# Altium PCB Resonator_Layout.PcbDoc
Units mil, origin at the board's own origin, x right, y up, seen from the top; angles counter-clockwise.
Board outline 830 x 1250 mil, 2 copper layers (Top Layer, Bottom Layer); 20 components, 19 nets, 84 pads, 21 vias.
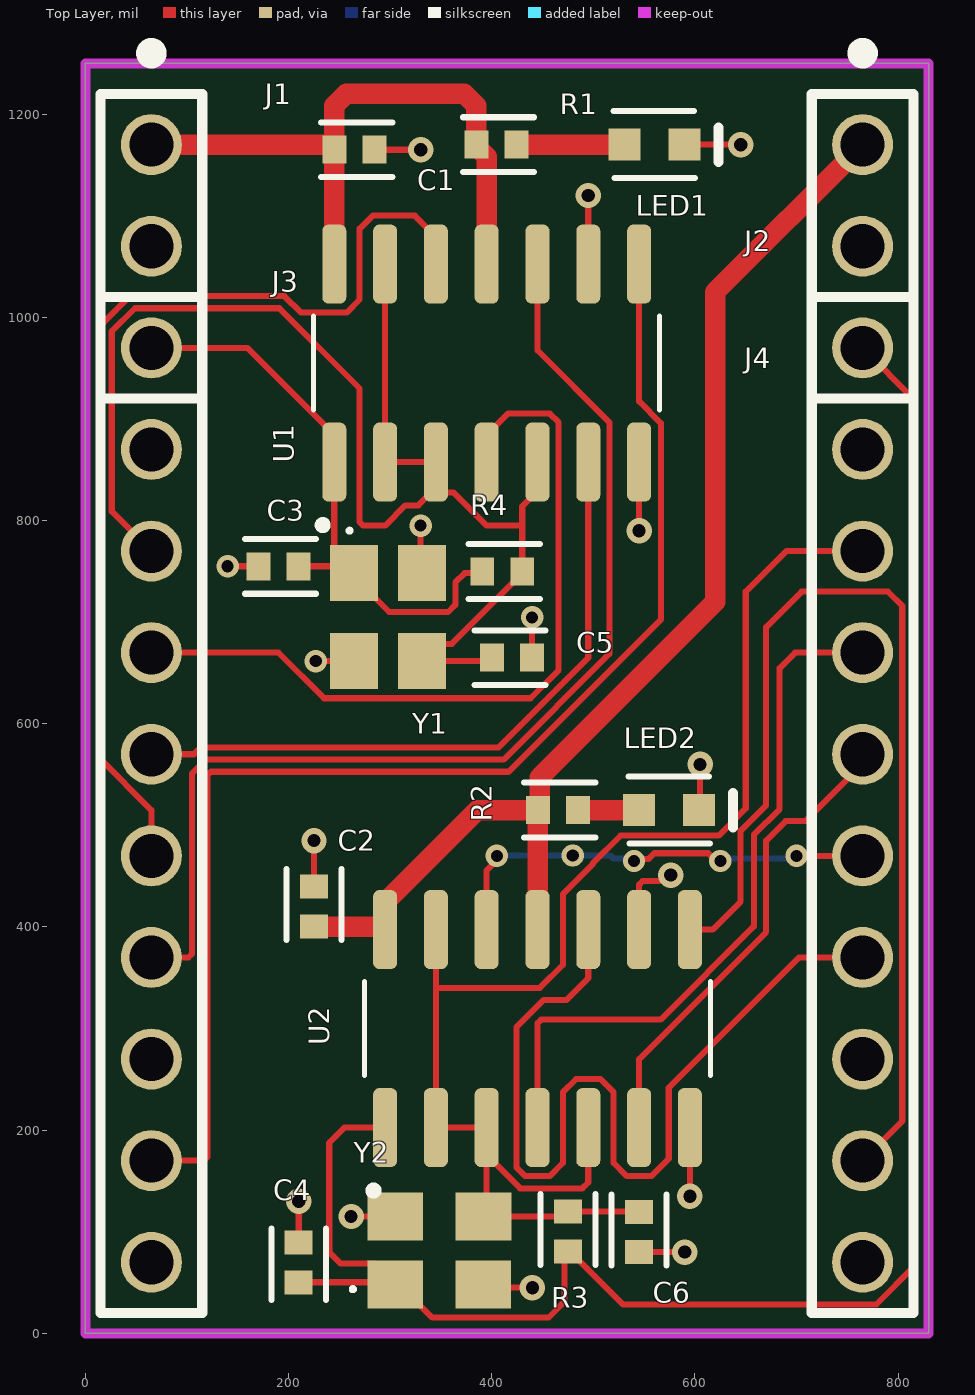
[diagram p0: Top Layer view]
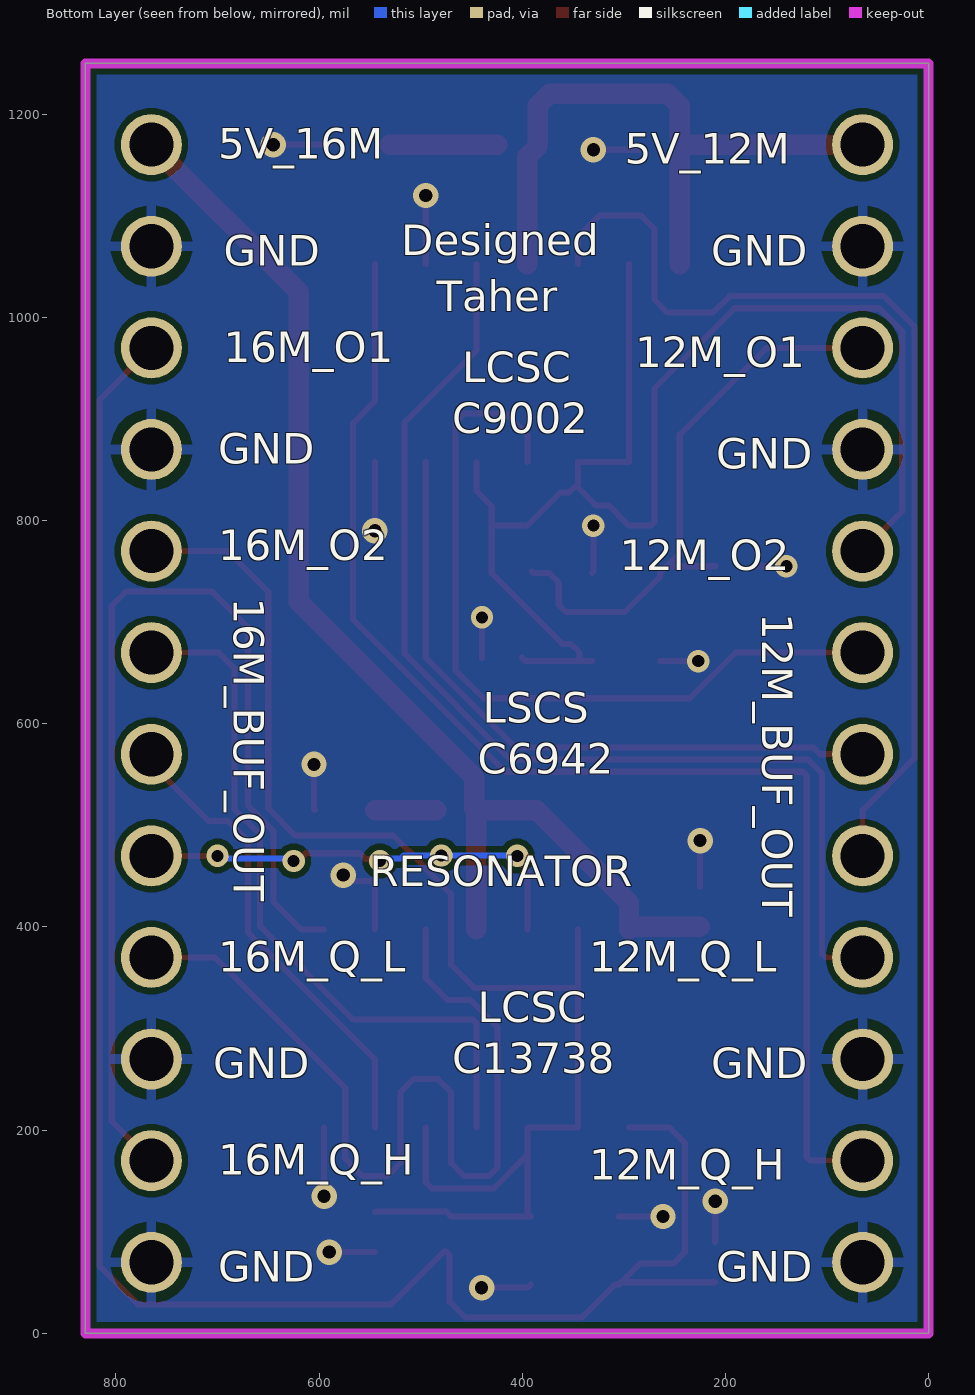
[diagram p1: Bottom Layer view, seen from below]
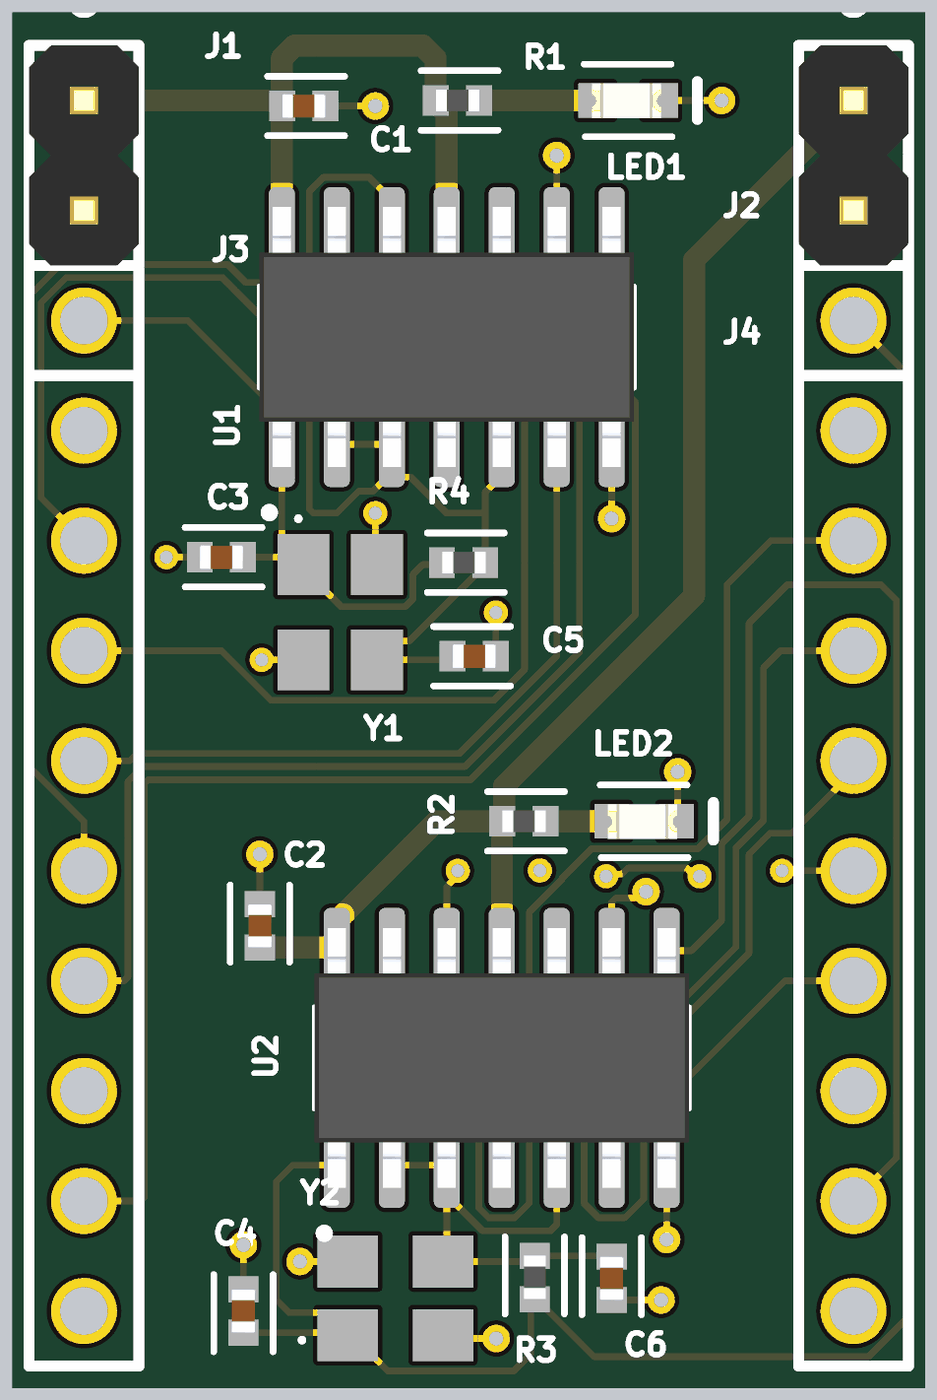
[diagram p2: 3D render of the assembled board from above, using the file's embedded part models]

## Layer stack, top to bottom
Top Solder: solder mask 0.4, Solder Resist, Dk 3.5
Top Layer: signal copper 1.4
Dielectric 1: dielectric 12.6, FR-4, Dk 4.8
Bottom Layer: signal copper 1.4
Bottom Solder: solder mask 0.4, Solder Resist, Dk 3.5

## Board outline
0,0 830,0 830,1250 0,1250

## Design rules (kind name [scope] priority, off if disabled: settings)
Clearance [All] p1: gap=6 ignorepadtopadclearanceinfootprint=FALSE except(0: SMDPad-Hole THPad-Hole Fill-Hole Poly-Hole Region-Hole Text-Hole)
HoleToHoleClearance [All] p1: gap=6 allowstackedmicrovias=TRUE
MinimumSolderMaskSliver [All] p1: minsoldermaskwidth=6
PolygonConnect [All] p1: connectstyle=Direct reliefconductorwidth=10 reliefentries=4 polygonreliefangle="90 Angle" airgapwidth=10
RoutingVias [All] p1: holewidth=12 width=22 viastyle="Through Hole" minholewidth=12 minwidth=22 maxholewidth=20 maxwidth=32
SilkToSolderMaskClearance [IsPad] p1: minsilkscreentomaskgap=6 clearancetoexposedcopper=TRUE
SolderMaskExpansion [All] p1: expansion=4 istentingtop=FALSE
UnRoutedNet [All] p1: checkbadconnections=TRUE
Width [All] p1: maxlimit=20 minlimit=6 preferedwidth=8
26 further rules are at their usual default settings.

## Components (designator, comment, footprint, x,y, rotation, side; value= is the part's Value field where it differs from the comment)
C1 "10uF" 0402_Passive_Capacitor 265,1165 r0 top
C2 "10uF" 0402_Passive_Capacitor 225,420 r90 top
C3 "22pF" 0402_Passive_Capacitor 190,755 r0 top
C4 "22pF" 0402_Passive_Capacitor 210,70 r270 top
C5 "22pF" 0402_Passive_Capacitor 420,665 r180 top
C6 "22pF" 0402_Passive_Capacitor 545,99.68 r90 top
J1 "2 PIN" 2_PIN_100MIL 65,1120 r270 top
J2 "2 PIN" 2_PIN_100MIL 765,1120 r270 top
J3 "MALE 10PIN" 10_PIN_100MIL 65,970 r270 top value=MALE
J4 "MALE 10PIN" 10_PIN_100MIL 765,970 r270 top value=MALE
LED1 "0603Gr" LED_0603 560,1170 r0 top value=Green
LED2 "0603Gr" LED_0603 574.53,515 r0 top value=Green
R1 "1k" 0402_Passive_Resistor 404.68,1170 r0 top value="1K Ohm"
R2 "1k" 0402_Passive_Resistor 465,515 r0 top value="1K Ohm"
R3 "1M" 0402_Passive_Resistor 475,100.31 r90 top value="1M Ohm"
R4 "1M" 0402_Passive_Resistor 410.31,750 r0 top value="1M Ohm"
U1 "SN74AHC14DR" SOIC127P600X175-14N 395,955 r90 top
U2 "SN74AHC14DR" SOIC127P600X175-14N 445,300 r90 top
Y1 "X322512MSB4SI" "Crystal resonator" 300,705 r270 top value=12MHz
Y2 "X322516MLB4SI" "Crystal resonator" 348.3,83.5 r0 top value=16MHz

## Footprints (in the part's own frame and the unit in brackets; to place one, negate y for a bottom-side part, rotate by r counter-clockwise, add the part's x,y. Pads: shape width x height; smd on the part's side, far side on the other; paste and mask are expansions set on the pad)
2_PIN_100MIL [mil]
  round 60 hole 43.31: 1(-50,0) 2(50,0)
  silkscreen extent -145,-50 100,50, body extent -100,-50 100,50, height 336
10_PIN_100MIL [mil]
  round 60 hole 43.31: 1(0,0) 2(100,0) 3(200,0) 4(300,0) 5(400,0) 6(500,0) 7(600,0) 8(700,0) 9(800,0) 10(900,0)
  silkscreen extent -50,-50 950,50
0402_Passive_Capacitor [mm] "Reference: https://www.worthingtonassembly.com/perfect-0402-footprint"
  rect 0.6x0.7 smd mask+0: 1(-0.5,0) 2(0.5,0)
  silkscreen extent -0.84,-0.69 0.94,0.69, body extent -0.5,-0.27 0.5,0.28, height 0.5
0402_Passive_Resistor [mm] "Reference: https://www.worthingtonassembly.com/perfect-0402-footprint"
  rect 0.6x0.7 smd mask+0: 1(-0.5,0) 2(0.5,0)
  silkscreen extent -0.84,-0.69 0.94,0.69, body extent -0.49,-0.25 0.51,0.25, height 0.4
"Crystal resonator" [mil]
  rect 55.11x47.24 smd: 1(-43.3,-35.43) 2(43.31,-35.43) 3(43.32,31.5) 4(-43.3,31.5)
  silkscreen extent -87,-42 -83,-38, body extent -65,-47 65,47, height 31
LED_0603 [mm]
  rect 0.8x0.8 smd: 1(-0.75,0) 2(0.75,0)
  silkscreen extent -1.02,-0.84 1.6,0.84, body extent -0.84,-0.41 0.76,0.39, height 0.55
SOIC127P600X175-14N [mm]
  rrect50% 1.97x0.6 smd: 1(-2.475,3.81) 2(-2.475,2.54) 3(-2.475,1.27) 4(-2.475,0) 5(-2.475,-1.27) 6(-2.475,-2.54) 7(-2.475,-3.81) 8(2.475,-3.81) 9(2.475,-2.54) 10(2.475,-1.27) 11(2.475,0) 12(2.475,1.27) 13(2.475,2.54) 14(2.475,3.81)
  silkscreen extent -4.15,-4.33 1.17,4.33, body extent -3,-4.33 3,4.33, height 1.75

## Part data
C1 C2: library part C_10uF_0402, "10uF ±20% 6.3V X5R 0402 Multilayer Ceramic Capacitors MLCC - SMD/SMT RoHS", LCSC Part#=C15525, MFR Part #=CL05A106MQ5NUNC, Datasheet=https://datasheet.lcsc.com/lcsc/1810191215_Samsung-Electro-Mechanics-CL05A106MQ5NUNC_C15525.pdf, Type=Basic
C3 C4 C5 C6: library part C_22pF_0402, "MULTILAYER CERAMIC CAPACITORS MLCC - SMD/SMT 22PF 50V 0402 ROHS", LCSC Part#=C1555, MFR Part #=0402CG220J500NT, Datasheet=https://datasheet.lcsc.com/szlcsc/Guangdong-Fenghua-Advanced-Tech-0402CG220J500NT_C1555.pdf, Type=Basic
J1 J2: library part J_2_PIN_HEADER, "2.54mm Straight 2 1 Header，Breakaway Through Hole,P=2.54mm Pin Header & Female Header ROHS", LCSC Part#=C124375, MFR Part #=B-2100S02P-A110, Datasheet=https://datasheet.lcsc.com/lcsc/1811151421_Ckmtw-Shenzhen-Cankemeng-B-2100S02P-A110_C124375.pdf, Type=Extended
J3 J4: library part JF_10_PIN_MALE, "Pin Header 10 1 right-angle，180degrees 2.54mm Through Hole,P=2.54mm Pin Header & Female Header RoHS", LCSC Part#=C124372, Datasheet=https://datasheet.lcsc.com/szlcsc/1810241611_Ckmtw-Shenzhen-Cankemeng-C124372_C124372.pdf, Type=Extended
LED1 LED2: library part LED_GREEN_0603, "LIGHT EMITTING DIODES (LED) GREEN 520~535NM 112~258MCD@20MA TOP VIEW 0603 ROHS", LCSC Part#=C72043, MFR Part #=19-217/GHC-YR1S2/3T, Type=Basic
R1 R2: library part R_1K_0402, "1 kOhms chip resistor SURFACE MOUNT 1KOHMS ±1% 1/16W 0402 ROHS", LCSC Part#=C11702, MFR Part #=0402WGF1001TCE, Datasheet=https://datasheet.lcsc.com/szlcsc/Uniroyal-Elec-0402WGF1001TCE_C11702.pdf, Type=Basic
R3 R4: library part R_1M_0402, "CHIP RESISTOR - SURFACE MOUNT 1MOHMS ±1% 1/16W 0402 ROHS", LCSC Part#=C26083, MFR Part #=0402WGF1004TCE, Datasheet=https://datasheet.lcsc.com/szlcsc/Uniroyal-Elec-0402WGF1004TCE_C26083.pdf, Type=Basic
U1 U2: "6-ch, 2-V to 5.5-V inverters with Schmitt-Trigger inputs", Package="SOIC-14 Texas Instruments", Availability="In Stock", Check_prices=https://www.snapeda.com/parts/SN74AHC14DR/Texas+Instruments/view-part/?ref=eda, MF="Texas Instruments", MP=SN74AHC14DR, Price=None, Purchase-URL=https://pricing.snapeda.com/search/part/SN74AHC14DR/?ref=eda, SnapEDA_Link=https://www.snapeda.com/parts/SN74AHC14DR/Texas+Instruments/view-part/?ref=snap
Y1: library part X_12MHz_Res, "SMD Crystal Resonators 12MHz ±10ppm SMD-3225_4P RoHS", LCSC Part#=C9002, Datasheet=https://datasheet.lcsc.com/szlcsc/Yangxing-Tech-X322512MSB4SI_C9002.pdf, MFR Part #=X322512MSB4SI, Type=Basic
Y2: library part X_16Mhz_Res, "±10ppm 16000000Hz -40℃~85℃ 贴片无源晶振 60Ω 9pF SMD3225-4P Crystals ROHS", LCSC Part#=C13738, MFR Part #=X322516MLB4SI, Type=Basic

## Via types
v1: diameter 25, hole 13, Top Layer to Bottom Layer, 12 vias
v2: diameter 22, hole 12, Top Layer to Bottom Layer, 9 vias

## Nets (pads, with @x,y where several pads share a name; then routed paths per layer and width w, separated by ;. In a path a pad name is that pad's centre, name@x,y a point inside that pad or via, vN(x,y) a via of type N, cw(c..) or ccw(c..) an arc to the next point about the centre after c; other vN are vias at no path point)
12M_BUF_OUT: J3.4 U1.4 | length 784.7
  Top Layer w6: J3.4 190.1,670 234.97,625.13 438.13,625.13 465.81,652.81 465.81,896.61 457.08,905.34 415.81,905.34 395,884.53 U1.4
12M_BUF_OUT1: J3.5 U1.6 | length 661.9
  Top Layer w6: J3.5 106.83,570 113.57,576.75 406.72,576.75 495,665.03 U1.6
12M_BUF_OUT2: J3.6 U1.12 | length 1008.4
  Top Layer w6: J3.6 65,514.85 14,565.85 14,991.12 43.88,1021 195.97,1021 212.31,1004.66 257.08,1004.66 270,1017.58 270,1087.3 282.92,1100.22 324.19,1100.22 345,1079.41 U1.12
12M_O1: C3.2 J3.1 R4.1 U1.1 Y1.1 | length 581.7
  Top Layer w6: J3.1 159.53,970 245,884.53 U1.1 245,767.87 Y1.1@257.87,755 ; C3.2 Y1.1@257.87,755 ; R4.1 388.96,748.33 373.33,748.33 364.12,739.12 364.12,717.02 357.1,710 298.94,710 264.57,744.37 Y1.1 Y1.1@257.87,755
12M_O2: C5.2 J3.3 R4.2 U1.2 U1.3 U1.5 U1.13 Y1.3 | length 1439.4
  Top Layer w6: J3.3 26,809 26,986.15 48.85,1009 191,1009 270,930 270,798.51 273.51,795 295,795 315,815 327.84,815 U1.3@345,832.16 ; U1.13 U1.2 U1.3 ; Y1.3 Y1.3@343.65,661.68 ; U1.3@345,841.25 U1.3 ; C5.2 397,661.68 Y1.3@343.65,661.68 ; U1.5 445,829.02 430,814.02 430,795 ; Y1.3@343.65,661.68 343.65,670.17 352.12,678.64 360.6,678.64 381.97,700 430,748.03 R4.2 430,795 ; U1.3 345,836.29 353.59,827.7 362.3,827.7 395,795 430,795
12M_Q_HIGH: J3.9 U1.8 | length 1301
  Top Layer w6: J3.9 116.49,170 120,173.51 120,549.23 123.51,552.75 416.66,552.75 566.5,702.59 566.5,895.92 545,917.42 U1.8
12M_Q_LOW: J3.7 U1.10 | length 1091.6
  Top Layer w6: J3.7 101.49,370 105,373.51 105,551.2 118.54,564.75 411.69,564.75 515.81,668.87 515.81,896.61 445,967.42 U1.10
16M_BUF_OUT: J4.4 U2.4 | length 707.9
  Top Layer w6: U2.4 445,305.24 448.52,308.76 566.18,308.76 658,400.58 658,490.78 683.26,516.04 683.26,654.74 698.51,670 J4.4
16M_BUF_OUT1: J4.5 U2.6 | length 470
  Top Layer w6: U2.6 545,270 670,395 670,485 689.19,504.19 708.72,504.19 765,560.47 J4.5
16M_BUF_OUT2: J4.6 U2.12 | length 447.4
  Top Layer w6: U2.12 395,455.67 405,465.67 v2(405,470) ; v2(540,465) 541.92,466.92 554.36,466.92 560,472.56 613.11,472.56 620.67,465 v2(625,465) ; v2(700,470) J4.6
  Bottom Layer w6: v2(405,470) 405.15,470.15 479.56,470.15 v2(479.71,470.29) 517,470.29 520,467.29 537.71,467.29 v2(540,465) ; v2(625,465) 627.5,467.5 697.5,467.5 v2(700,470)
16M_O1: C4.2 J4.1 R3.1 U2.1 Y2.1 | length 1880.6
  Top Layer w6: C4.2 Y2.1@302.76,50.31 ; U2.1 255,202.56 240,187.56 240,80 251.31,68.69 284.38,68.69 Y2.1@302.76,50.31 ; J4.1 816,919 816,65.85 778.65,28.5 529.1,28.5 476.97,80.63 R3.1 471.5,77.13 471.5,31.09 455.86,15.45 341.56,15.45 308.93,48.07 Y2.1 Y2.1@302.76,50.31
16M_O2: C6.2 J4.3 R3.2 U2.2 U2.3 U2.5 U2.13 Y2.3 | length 1424
  Top Layer w6: U2.13 345,340 ; U2.5 495,148.51 489.26,142.78 427.81,142.78 U2.3@395,175.59 ; C6.2 544.37,120 R3.2 470,115 Y2.3 395,118.38 U2.3@395,175.59 ; J4.3 690,770 650,730 650,516.72 623.28,490 526.72,490 499.71,462.99 499.71,462.01 470,432.3 470,362.58 447.42,340 345,340 ; 345,340 U2.2 U2.3 U2.3@395,175.59
16M_Q_HIGH: J4.9 U2.8 | length 1058.2
  Top Layer w6: U2.8 617.44,397.44 645,425 645,494.75 670,519.75 670,695 705,730 790,730 804,716 804,209 J4.9
16M_Q_LOW: J4.7 U2.10 | length 911.7
  Top Layer w6: U2.10 495,349.66 473.34,328 450.79,328 424.19,301.4 424.19,163.51 432.92,154.78 457.08,154.78 470,167.7 470,237.42 482.92,250.34 507.08,250.34 520,237.42 520,167.7 532.92,154.78 557.08,154.78 574.19,171.89 574.19,241.61 702.58,370 J4.7
+5V_12M: C1.1 J1.1 R1.1 U1.11 U1.14 | length 645
  Top Layer w20: J1.1 C1.1@242.28,1170 ; U1.14 245,1167.28 C1.1@242.28,1170 ; U1.11 395,1158.03 385,1168.03 385,1173.59 384.81,1173.78 384.81,1208.28 373.09,1220 256.68,1220 244.97,1208.28 244.97,1172.69 C1.1@242.28,1170
+5V_16M: C2.1 J2.1 R2.1 U2.11 U2.14 | length 1190.7
  Top Layer w20: C2.1 293.19,400.32 U2.14@295,398.5 ; U2.14 U2.14@295,398.5 ; U2.11 445.16,397.6 445.16,514.84 R2.1 ; J2.1 620,1025 620,720 447.13,547.13 447.13,516.81 R2.1 ; U2.14@295,398.5 295,424.41 385.59,515 R2.1
GND: C1.2 C2.2 C3.1 C4.1 C5.1 C6.1 J1.2 J2.2 J3.2 J3.8 J3.10 J4.2 J4.8 J4.10 LED1.2 LED2.2 U1.7 U1.9 U2.7 U2.9 Y1.2 Y1.4 Y2.2 Y2.4 | length 810.1
  Top Layer w6: v2(140,755) C3.1 ; C4.1 v1(210,130) ; C2.2 v1(225,485) ; v2@225,660 v2(226.69,661.69) Y1.2 ; v1(261.5,115) Y2.4 ; C1.2 v1(330,1165) ; v2(330,795) 330,749.8 Y1.4 ; Y2.2 394.68,45 v1(440,45) ; C5.1 v2(439.68,704.68) v2@440,705 ; U1.9 v1(495,1120) ; C6.1 v1(590,80) ; U2.9 545,441.72 548.51,445.23 565.27,445.23 571.1,451.06 v1(576.24,451.06) ; v1(545,790) U1.7 ; LED1.2 v1(645,1170) ; v1(595,135) U2.7 ; LED2.2 605,515.94 v1(605,560)
NetLED1_1: LED1.1 R1.2 | length 106.1
  Top Layer w20: R1.2 LED1.1
NetLED2_1: LED2.1 R2.2 | length 60.3
  Top Layer w20: R2.2 LED2.1

## Polygon pours and split planes (outlines as drawn)
GND on Bottom Layer "GND_L02_P000" (solid, pour order 0): 0,1250 830,1250 830,0 0,0

## Keep-outs
Keep-Out Layer:
  the board outline again, w10

## Silkscreen, mask and mechanical layers (free items; w line width, h text height)
Bottom Overlay:
  text "5V_16M" at 699,1156 h30
  text "5V_12M" at 299,1151 h30
  text "Designed" at 519,1061 h30
  text "GND" at 214,1051 h30
  text "GND" at 694,1051 h30
  text "Taher" at 484,1006 h30
  text "16M_O1" at 694,956 h30
  text "12M_O1" at 289,951 h30
  text "LCSC" at 459,936 h30
  text "C9002" at 469,886 h30
  text "GND" at 699,856 h30
  text "GND" at 209,851 h30
  text "16M_O2" at 699,761 h30
  text "12M_O2" at 304,751 h30
  text "16M_BUF_OUT" at 684,724 h30 r90
  text "12M_BUF_OUT" at 164,709 h30 r90
  text "LSCS" at 439,601 h30
  text "C6942" at 444,551 h30
  text "RESONATOR" at 550,440 h30
  text "12M_Q_L" at 334,356 h30
  text "16M_Q_L" at 699,356 h30
  text "LCSC" at 444,306 h30
  text "C13738" at 469,256 h30
  text "GND" at 214,251 h30
  text "GND" at 704,251 h30
  text "16M_Q_H" at 699,156 h30
  text "12M_Q_H" at 334,151 h30
  text "GND" at 209,51 h30
  text "GND" at 699,51 h30